# EAGLE board CS4270-breakout (EAGLE 9.4.0)
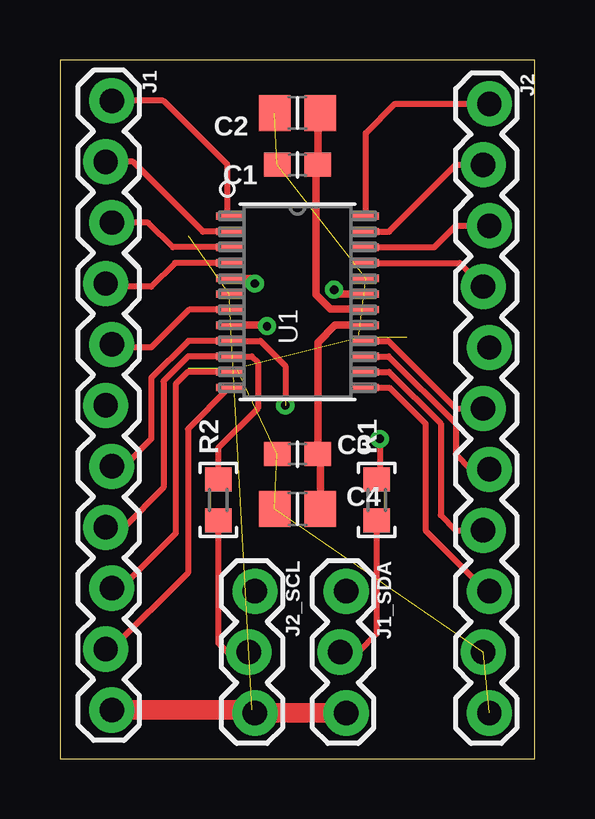
[diagram p0: board, top side]
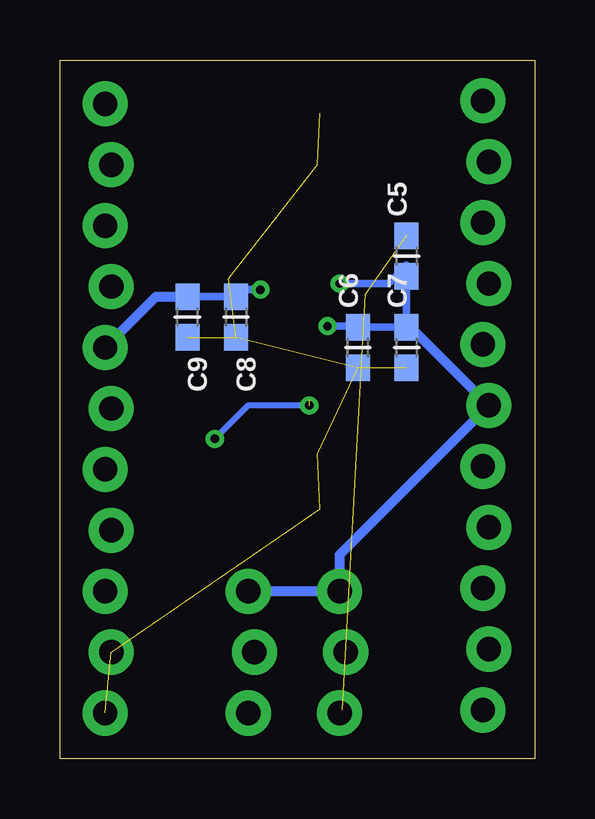
[diagram p1: board, bottom side, seen from below]

Size 19.79 x 29.13 mm. Coordinates in mm from the lower left corner, seen from the top.
Outline: 0,0 19.79,0 19.79,29.13 0,29.13 0,0
Copper layers (1*16): Top 0.035mm / dielectric 1.5mm / Bottom 0.035mm
Design rules "default": minimum track width 6mil, minimum drill 0.35mm, track to track 6mil, track to pad 6mil, pad to pad 6mil, via to via 6mil, smd to smd 6mil, copper to edge 40mil, drill to drill 6mil, minimum pad ring 10mil, minimum via ring 8mil, stop-mask expansion 4mil, vias tented up to drill 0mil, thermal gap 10mil

## Footprints (pad centres in the part's own frame; a part is rotated, then mirrored left to right if it is on the bottom)
C0603 = smd 1.1 x 1: 1 -0.85,0; 2 0.85,0
C0805 = smd 1.3 x 1.5: 1 -0.95,0; 2 0.95,0
1X11_LOCK = drill 1.016 pad 1.88: 1 0,0.127; 2 2.54,-0.127; 3 5.08,0.127; 4 7.62,-0.127; 5 10.16,0.127; 6 12.7,-0.127; 7 15.24,0.127; 8 17.78,-0.127; 9 20.32,0.127; 10 22.86,-0.127; 11 25.4,0.127
1X03_LOCK = drill 1.016 pad 1.88: 1 0,0.127; 2 2.54,-0.127; 3 5.08,0.127
R0603 = smd 1 x 1.1: 1 -0.85,0; 2 0.85,0
CIR-TSSOP-24-L = smd 1.118 x 0.305: 1 -2.845,3.575; 2 -2.845,2.925; 3 -2.845,2.275; 4 -2.845,1.625; 5 -2.845,0.975; 6 -2.845,0.325; 7 -2.845,-0.325; 8 -2.845,-0.975; 9 -2.845,-1.625; 10 -2.845,-2.275; 11 -2.845,-2.925; 12 -2.845,-3.575; 13 2.845,-3.575; 14 2.845,-2.925; 15 2.845,-2.275; 16 2.845,-1.625; 17 2.845,-0.975; 18 2.845,-0.325; 19 2.845,0.325; 20 2.845,0.975; 21 2.845,1.625; 22 2.845,2.275; 23 2.845,2.925; 24 2.845,3.575

## Placement (x,y rotation side)
C1  [C0603]  9.91,24.77 180 top
C2  [C0805]  9.91,26.92 180 top
C3  [C0603]  9.91,12.7 0 top
C4  [C0805]  9.91,10.41 0 top
C5  [C0603]  5.33,20.95 90 bottom
C6  [C0603]  7.37,17.14 90 bottom
C7  [C0603]  5.33,17.14 90 bottom
C8  [C0603]  12.45,18.41 270 bottom
C9  [C0603]  14.48,18.41 270 bottom
J1  [1X11_LOCK]  2.03,27.43 270 top
J1_SDA  [1X03_LOCK]  11.81,6.99 270 top
J2  [1X11_LOCK]  17.78,27.3 270 top
J2_SCL  [1X03_LOCK]  8,6.99 270 top
R1  [R0603]  13.21,10.79 90 top
R2  [R0603]  6.6,10.79 90 top
U1  CS4270-CZZCIR-TSSOP-24-L  [CIR-TSSOP-24-L]  9.91,19.05 0 top

## Library data of the parts
C1-C9 R1 R2 = 0000-master
J1 J1_SDA J2 J2_SCL = SparkFun-Connectors
U1 = 0000-master; MANUFACTURER_PART_NUMBER: CS4270CZZ; VENDOR: Cirrus Logic

## Nets
+3V3: C5.1 C6.2 C7.2 J1.6 J1_SDA.1 J2_SCL.1 U1.5 U1.8
+5V: C8.1 C9.1 J2.5 U1.19
AD0: J1.9 U1.11
AGND: C1.2 C2.2 C3.1 C4.1 C6.1 C7.1 C8.2 C9.2 J2.10 J2.11 U1.20
AINA: J2.7 U1.15
AINB: J2.6 U1.16
AOUTA: J2.3 U1.22
AOUTB: J2.2 U1.23
DGND: C5.2 J1.11 J1_SDA.3 J2_SCL.3 U1.6
LRCK: J1.2 U1.2
MCLK: J1.3 U1.3
MDIV1: J1.10 U1.12
MDIV2: J2.9 U1.13
MUTEA: J2.4 U1.21
MUTEB: J2.1 U1.24
N$18: J1_SDA.2 R1.1
N$19: C1.1 C2.1 U1.18
N$21: C3.2 C4.2 U1.17
N$22: J2_SCL.2 R2.1
RST: J2.8 U1.14
SCL: J1.8 R2.2 U1.10
SCLK: J1.4 U1.4
SDA: J1.7 R1.2 U1.9
SDIN: J1.1 U1.1
SDOUT: J1.5 U1.7

## Tracks (layer width: path | path; a pad name or v marks a point on that pad's centre or on a via)
+3V3  (via drill 0.35)
  Top 0.305: U1.8 8.64,18.07 v8.64,18.03 | U1.5 8.04,20.02 8.13,19.94 v8.13,19.81
  Bottom 0.305: v8.64,18.03 7.4,18.03 C6.2 C7.2 C5.1 5.33,20.57 6.1,19.81 v8.13,19.81
  Bottom 0.406: C7.2 5.17,18 J1.6 8.13,8.51 J2_SCL.1 J1_SDA.1
+5V  (via drill 0.35)
  Top 0.305: U1.19 11.43,19.38 v11.43,19.56
  Bottom 0.305: v11.43,19.56 12.15,19.56 C8.1 C9.1
  Bottom 0.406: J2.5 15.79,19.27 C9.1
AD0
  Top 0.254: U1.11 5.33,16.12 4.83,15.62 4.83,9.4 2.54,7.11 J1.9
AGND  (10 unrouted)
AINA
  Top 0.254: U1.15 13.71,16.77 16.51,13.97 16.51,12.7 17.14,12.06 J2.7
AINB
  Top 0.254: U1.16 13.69,17.43 16.51,14.61 J2.6
AOUTA
  Top 0.254: U1.22 15.61,21.32 16.51,22.23 J2.3
AOUTB
  Top 0.254: U1.23 13.72,21.98 16.51,24.77 J2.2
DGND  (2 unrouted)
  Top 0.813: J1.11 8,2.03 J2_SCL.3 J1_SDA.3
LRCK
  Top 0.254: U1.2 5.96,21.98 3.05,24.89 J1.2
MCLK
  Top 0.254: U1.3 4.71,21.32 3.68,22.35 J1.3
MDIV1
  Top 0.254: U1.12 5.33,13.75 5.33,7.75 2.16,4.57 J1.10
MDIV2
  Top 0.254: U1.13 13.73,15.47 15.24,13.97 15.24,9.53 17.78,6.99 J2.9
MUTEA
  Top 0.254: U1.21 16.66,20.68 J2.4
MUTEB
  Top 0.254: U1.24 12.75,26.09 13.97,27.3 J2.1
N$18
  Top 0.254: R1.1 13.21,5.21 12.45,4.45 J1_SDA.2
N$19
  Top 0.305: U1.18 12.73,18.75 11.27,18.75 10.67,19.35 10.67,24.64 10.78,24.75 C1.1 10.76,26.82 C2.1
N$21
  Top 0.305: C4.2 10.86,12.6 C3.2 10.76,17.36 11.47,18.07 U1.17
N$22
  Top 0.254: R2.1 6.6,4.83 6.98,4.45 J2_SCL.2
RST
  Top 0.254: U1.14 13.72,16.12 15.88,13.97 15.88,10.16 16.51,9.53 J2.8
SCL
  Top 0.254: R2.2 6.6,12.95 8.26,14.61 8.26,16.51 7.99,16.77 U1.10 5.35,16.77 4.32,15.75 4.32,11.3 2.67,9.65 J1.8
SCLK
  Top 0.254: U1.4 4.8,20.68 3.81,19.68 2.03,19.68 J1.4
SDA  (via drill 0.35)  (1 unrouted)
  Top 0.254: J1.7 2.67,12.19 3.81,13.34 3.81,15.88 5.36,17.43 U1.9 8.36,17.43 9.4,16.38 9.4,14.99 | v13.33,13.34 13.33,11.77 R1.2
  Bottom 0.254: v9.4,14.73 11.94,14.73 v13.33,13.34
SDIN
  Top 0.254: U1.1 6.98,22.7 6.98,24.77 4.32,27.43 J1.1
SDOUT
  Top 0.254: U1.7 5.39,18.73 3.81,17.14 2.29,17.14 J1.5